# Altium PCB PCB1.PcbDoc
Units mm, origin at the board's own origin, x right, y up, seen from the top; angles counter-clockwise.
Board outline 180 x 120 mm, 4 copper layers (Top Layer, Internal Plane 1, Internal Plane 2, Bottom Layer), stack 0.462 mm thick; 68 components, 59 nets, 300 pads, 20 vias.
Unrouted connection lines stored in the file: 1.
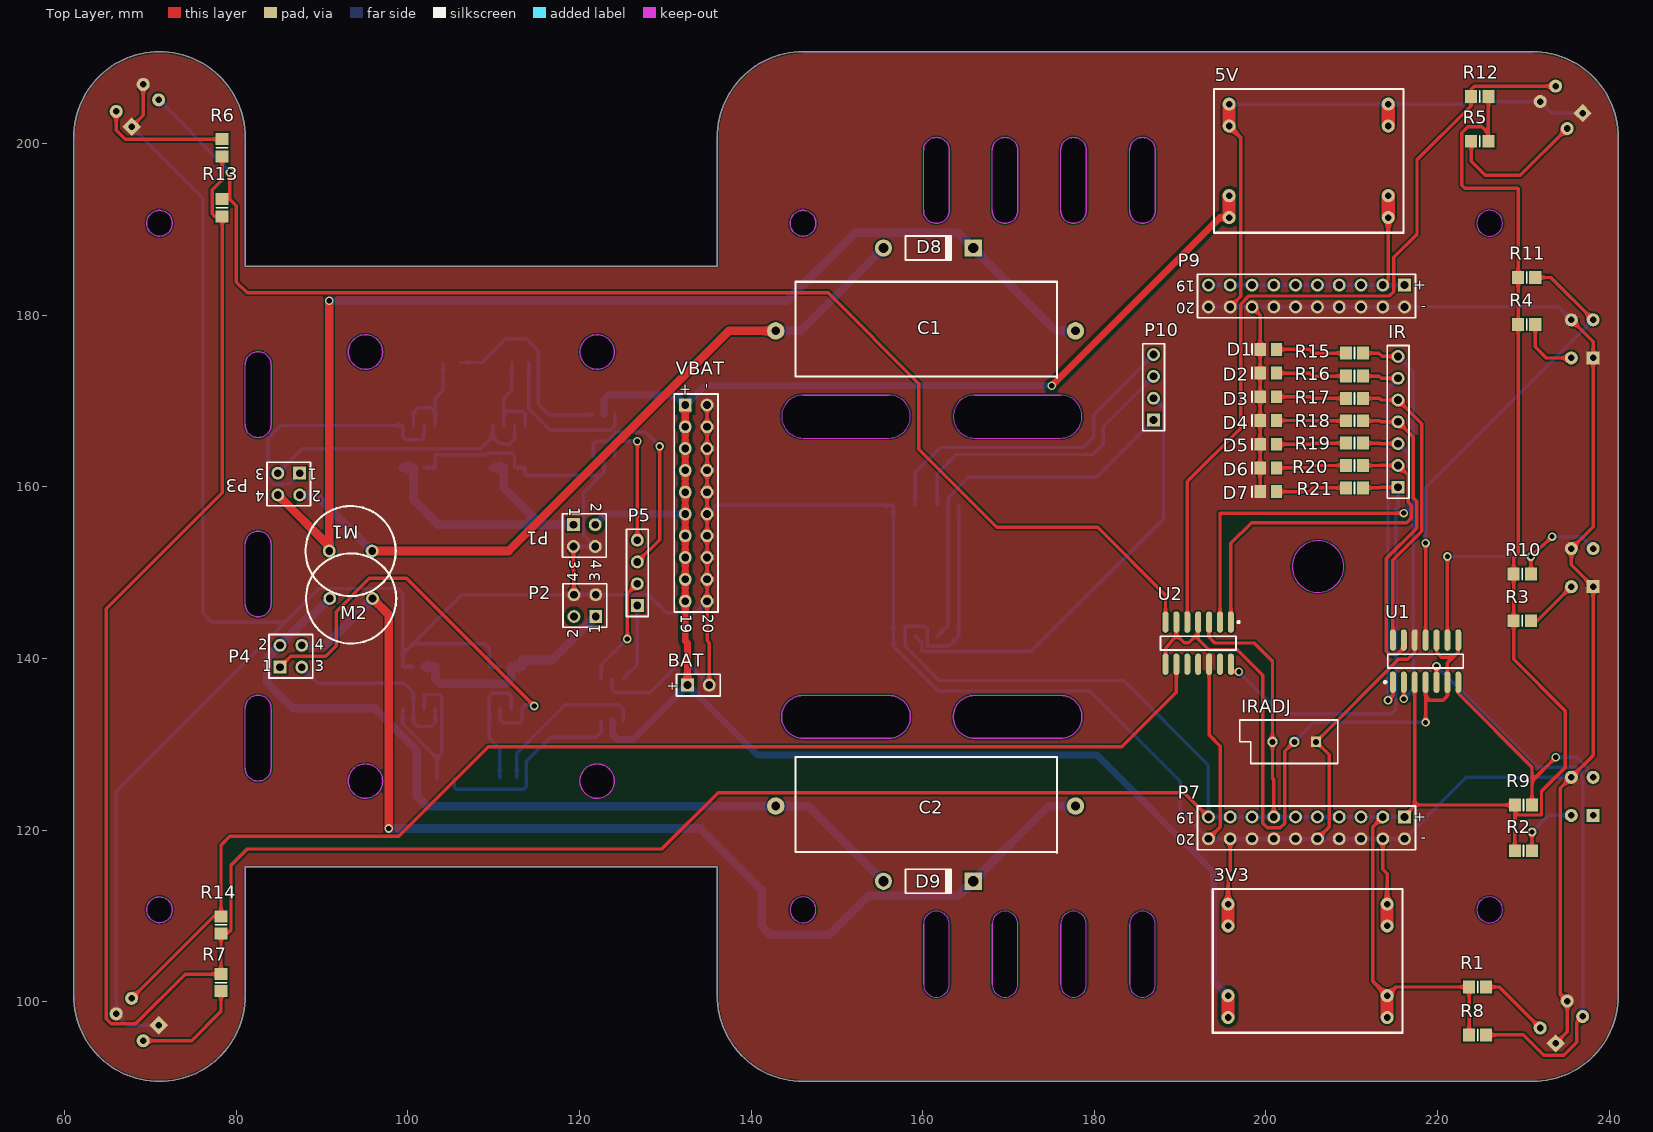
[diagram p0: Top Layer view]
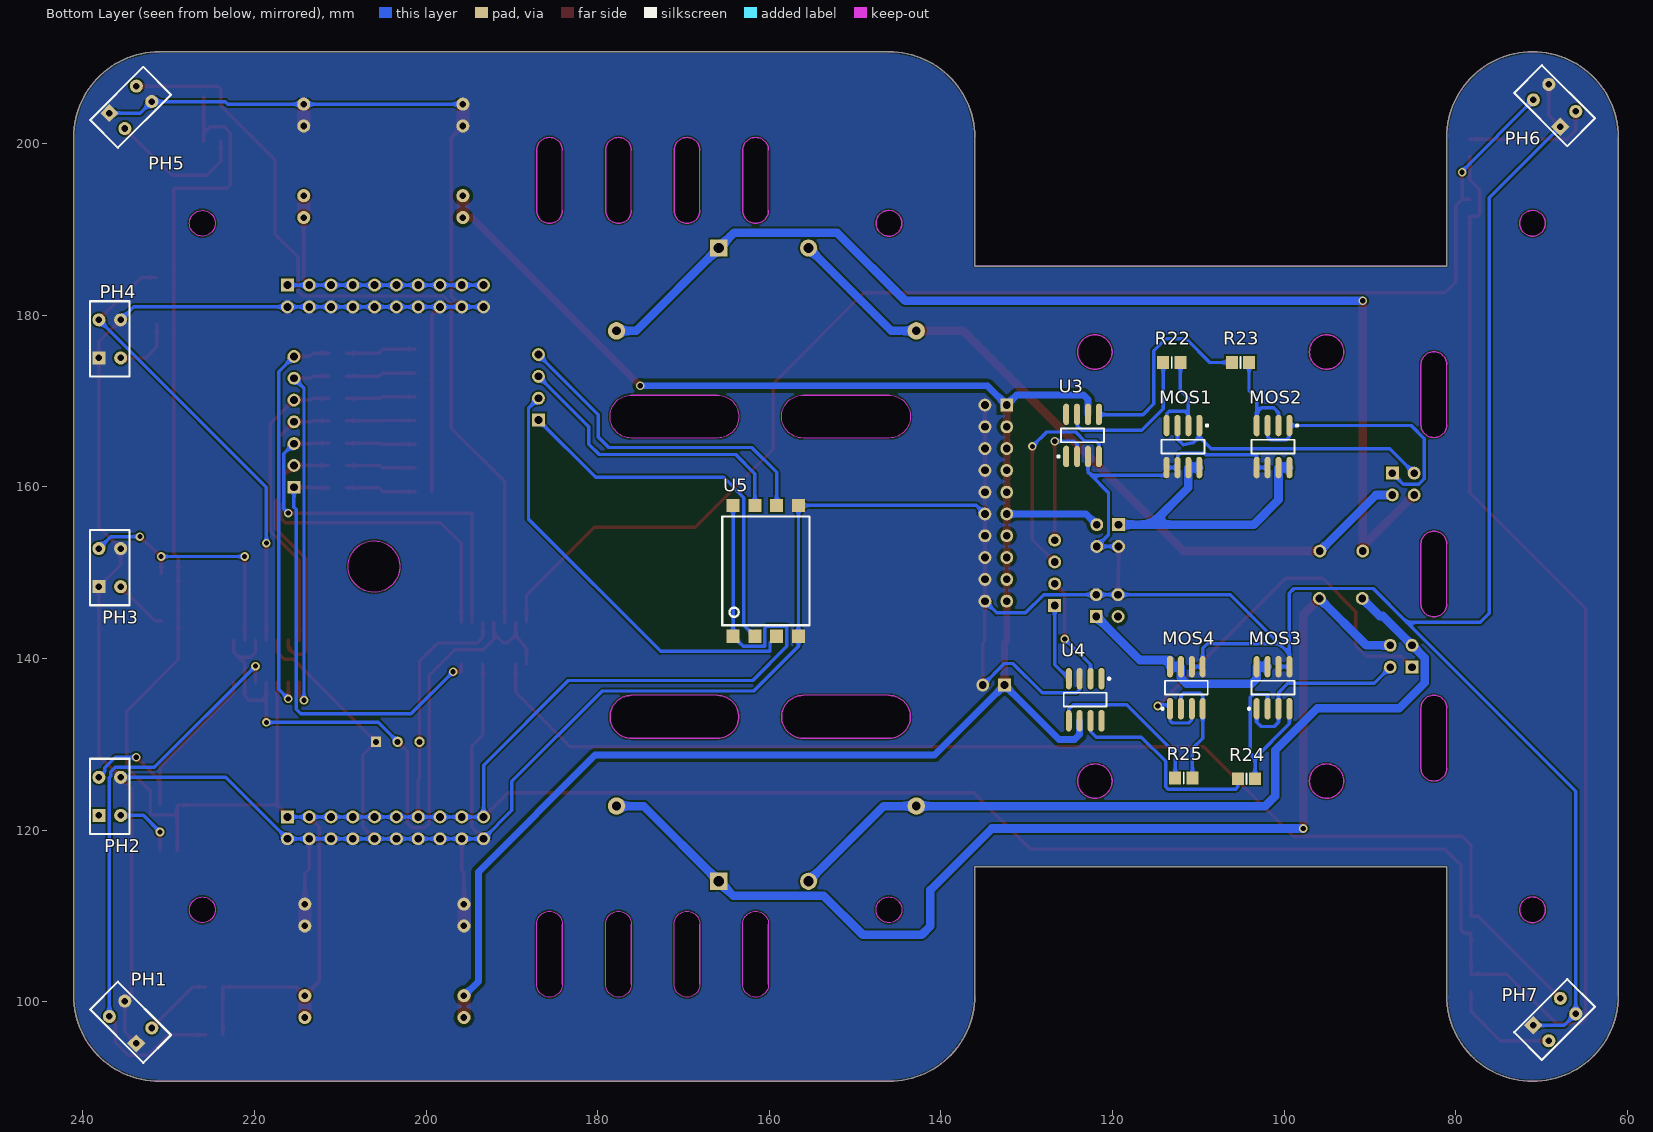
[diagram p1: Bottom Layer view, seen from below]
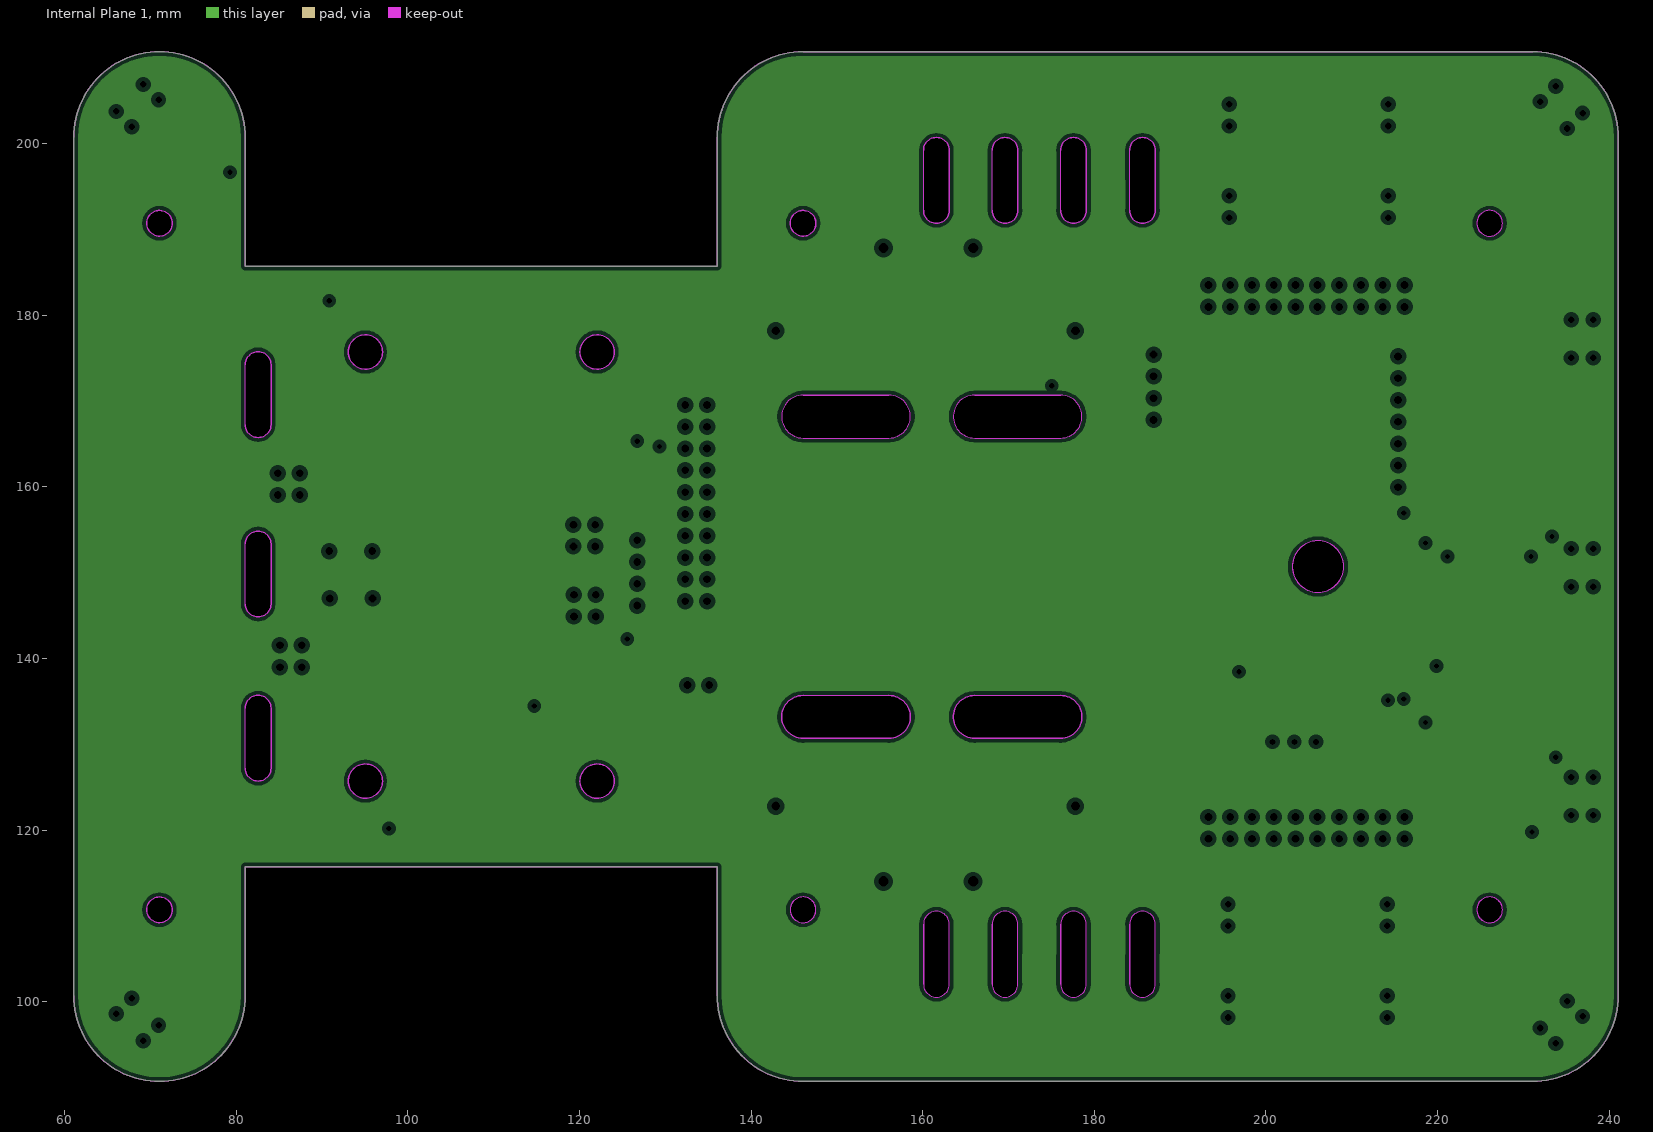
[diagram p2: Internal Plane 1, clearances drawn from the general rule]
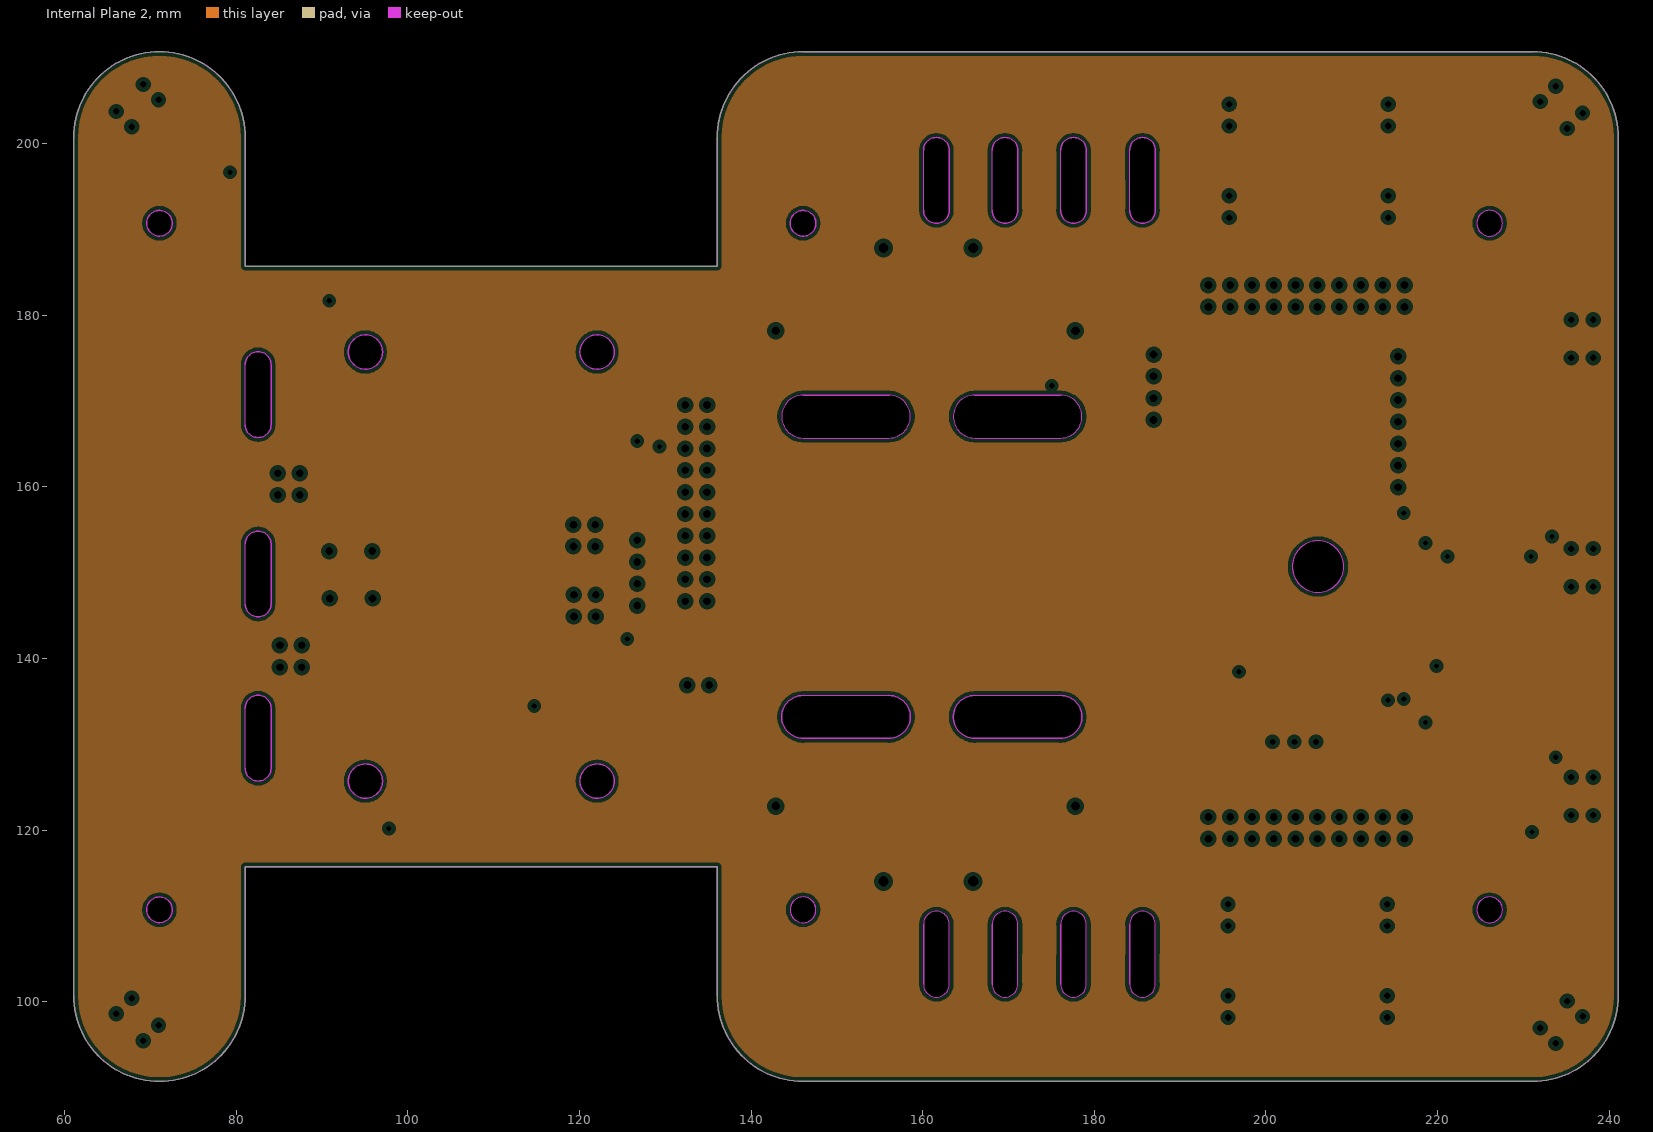
[diagram p3: Internal Plane 2, clearances drawn from the general rule]

## Layer stack, top to bottom
Top Solder: solder mask 0.0102, Solder Resist, Dk 3.5
Top Layer: signal copper 0.0356
Internal Plane 1: plane copper 0.0356
Internal Plane 2: plane copper 0.0356
Dielectric 1: dielectric 0.32, FR-4, Dk 4.8
Bottom Layer: signal copper 0.0356
Bottom Solder: solder mask 0.0102, Solder Resist, Dk 3.5

## Board outline
71.063,90.72 cw(c71.063,100.72) 61.063,100.72 61.063,200.72 cw(c71.063,200.72) 71.063,210.72 cw(c71.063,200.72) 81.063,200.72 81.063,185.72 136.063,185.72 136.063,200.72 cw(c146.063,200.72) 146.063,210.72 231.063,210.72 cw(c231.063,200.72) 241.063,200.72 241.063,100.72 cw(c231.063,100.72) 231.063,90.72 146.063,90.72 cw(c146.063,100.72) 136.063,100.72 136.063,115.72 81.063,115.72 81.063,100.72 cw(c71.063,100.72)
cut-out: 184.114,102.047 ccw(c185.614,102.047) 185.614,100.547 ccw(c185.614,102.047) 187.114,102.047 187.114,109.047 ccw(c185.614,109.047) 185.614,110.547 ccw(c185.614,109.047) 184.114,109.047
cut-out: 176.076,102.047 ccw(c177.576,102.047) 177.576,100.547 ccw(c177.576,102.047) 179.076,102.047 179.076,109.047 ccw(c177.576,109.047) 177.576,110.547 ccw(c177.576,109.047) 176.076,109.047
cut-out: 122.063,173.72 cw(c122.063,175.72) 120.063,175.72 cw(c122.063,175.72) 122.063,177.72 cw(c122.063,175.72) 124.063,175.72 cw(c122.063,175.72)
cut-out: 95.063,173.72 cw(c95.063,175.72) 93.063,175.72 cw(c95.063,175.72) 95.063,177.72 cw(c95.063,175.72) 97.063,175.72 cw(c95.063,175.72)
cut-out: 71.063,189.22 cw(c71.063,190.72) 69.563,190.72 cw(c71.063,190.72) 71.063,192.22 cw(c71.063,190.72) 72.563,190.72 cw(c71.063,190.72)
cut-out: 82.563,165.752 cw(c82.563,167.252) 81.063,167.252 81.063,174.252 cw(c82.563,174.252) 82.563,175.752 cw(c82.563,174.252) 84.063,174.252 84.063,167.252 cw(c82.563,167.252)
cut-out: 82.563,144.853 cw(c82.563,146.353) 81.063,146.353 81.063,153.353 cw(c82.563,153.353) 82.563,154.853 cw(c82.563,153.353) 84.063,153.353 84.063,146.353 cw(c82.563,146.353)
cut-out: 82.563,125.72 cw(c82.563,127.22) 81.063,127.22 81.063,134.22 cw(c82.563,134.22) 82.563,135.72 cw(c82.563,134.22) 84.063,134.22 84.063,127.22 cw(c82.563,127.22)
cut-out: 71.063,109.22 cw(c71.063,110.72) 69.563,110.72 cw(c71.063,110.72) 71.063,112.22 cw(c71.063,110.72) 72.563,110.72 cw(c71.063,110.72)
cut-out: 95.063,123.72 cw(c95.063,125.72) 93.063,125.72 cw(c95.063,125.72) 95.063,127.72 cw(c95.063,125.72) 97.063,125.72 cw(c95.063,125.72)
cut-out: 122.063,123.72 cw(c122.063,125.72) 120.063,125.72 cw(c122.063,125.72) 122.063,127.72 cw(c122.063,125.72) 124.063,125.72 cw(c122.063,125.72)
cut-out: 144.563,110.72 ccw(c146.063,110.72) 146.063,109.22 ccw(c146.063,110.72) 147.563,110.72 ccw(c146.063,110.72) 146.063,112.22 ccw(c146.063,110.72)
cut-out: 160.096,102.047 ccw(c161.596,102.047) 161.596,100.547 ccw(c161.596,102.047) 163.096,102.047 163.096,109.047 ccw(c161.596,109.047) 161.596,110.547 ccw(c161.596,109.047) 160.096,109.047
cut-out: 168.086,102.047 ccw(c169.586,102.047) 169.586,100.547 ccw(c169.586,102.047) 171.086,102.047 171.086,109.047 ccw(c169.586,109.047) 169.586,110.547 ccw(c169.586,109.047) 168.086,109.047
cut-out: 166.063,130.698 cw(c166.063,133.198) 166.063,135.698 176.063,135.698 cw(c176.063,133.198) 176.063,130.698
cut-out: 146.063,130.698 cw(c146.063,133.198) 146.063,135.698 156.063,135.698 cw(c156.063,133.198) 156.063,130.698
cut-out: 203.063,150.72 ccw(c206.063,150.72) 206.063,147.72 ccw(c206.063,150.72) 209.063,150.72 ccw(c206.063,150.72) 206.063,153.72 ccw(c206.063,150.72)
cut-out: 224.563,110.72 ccw(c226.063,110.72) 226.063,109.22 ccw(c226.063,110.72) 227.563,110.72 ccw(c226.063,110.72) 226.063,112.22 ccw(c226.063,110.72)
cut-out: 224.563,190.72 ccw(c226.063,190.72) 226.063,189.22 ccw(c226.063,190.72) 227.563,190.72 ccw(c226.063,190.72) 226.063,192.22 ccw(c226.063,190.72)
cut-out: 161.596,190.72 cw(c161.596,192.22) 160.096,192.22 160.096,199.22 cw(c161.596,199.22) 161.596,200.72 cw(c161.596,199.22) 163.096,199.22 163.096,192.22 cw(c161.596,192.22)
cut-out: 169.586,190.72 cw(c169.586,192.22) 168.086,192.22 168.086,199.22 cw(c169.586,199.22) 169.586,200.72 cw(c169.586,199.22) 171.086,199.22 171.086,192.22 cw(c169.586,192.22)
cut-out: 177.576,190.72 cw(c177.576,192.22) 176.076,192.22 176.076,199.22 cw(c177.576,199.22) 177.576,200.72 cw(c177.576,199.22) 179.076,199.22 179.076,192.22 cw(c177.576,192.22)
cut-out: 185.614,190.72 cw(c185.614,192.22) 184.114,192.22 184.114,199.22 cw(c185.614,199.22) 185.614,200.72 cw(c185.614,199.22) 187.114,199.22 187.114,192.22 cw(c185.614,192.22)
cut-out: 146.063,189.22 cw(c146.063,190.72) 144.563,190.72 cw(c146.063,190.72) 146.063,192.22 cw(c146.063,190.72) 147.563,190.72 cw(c146.063,190.72)
cut-out: 146.063,165.698 156.063,165.698 ccw(c156.063,168.198) 156.063,170.698 146.063,170.698 ccw(c146.063,168.198)
cut-out: 166.063,165.698 176.063,165.698 ccw(c176.063,168.198) 176.063,170.698 166.063,170.698 ccw(c166.063,168.198)

## Design rules (kind name [scope] priority, off if disabled: settings)
Clearance Clearance_1 [InNet('VBAT')] p1: gap=0.4
Clearance [All] p2: gap=0.2
PlaneClearance [All] p1: clearance=0.508
PlaneConnect [All] p1: planeconnectstyle=Relief reliefexpansion=0.508 reliefentries=4 reliefconductorwidth=0.254 reliefairgap=0.254
PolygonConnect [All] p1: connectstyle=Direct reliefconductorwidth=0.254 reliefentries=4 polygonreliefangle="90 Angle" airgapwidth=0.254
RoomDefinition Sheet2 [InComponentClass('Sheet2')] p1: confinementstyle=ConfineIn formatcopy=TRUE lockcomponents=FALSE outline 242.189,142.113 419.862,142.113 419.862,190.246 242.189,190.246
RoomDefinition Sheet1 [InComponentClass('Sheet1')] p2: confinementstyle=ConfineIn formatcopy=TRUE lockcomponents=FALSE outline 242.189,125.857 455.549,125.857 455.549,190.246 242.189,190.246
RoomDefinition POWER [InComponentClass('POWER')] p3: confinementstyle=ConfineIn formatcopy=TRUE lockcomponents=FALSE outline 242.189,92.329 278.511,92.329 278.511,124.714 242.189,124.714
RoutingVias [All] p1: holewidth=0.6 width=1 viastyle="Through Hole" minholewidth=0.711 minwidth=1.27 maxholewidth=0.711 maxwidth=1.27
SolderMaskExpansion [All] p1: expansion=0.102
UnpouredPolygon [All] p1: allowunpoured=FALSE
Width Width_7 [InNet('NetC2_2')] p1: maxlimit=2 minlimit=0.5 preferedwidth=1
Width Width_6 [InNet('NetC2_1')] p2: maxlimit=2 minlimit=0.5 preferedwidth=1
Width Width_5 [InNet('NetC1_2')] p3: maxlimit=2 minlimit=0.5 preferedwidth=1
Width Width_4 [InNet('NetC1_1')] p4: maxlimit=2 minlimit=0.5 preferedwidth=1
Width Width_3 [InNet('VBAT')] p5: maxlimit=2 minlimit=0.5 preferedwidth=0.8
Width Width_2 [InNet('VADJ1')] p6: maxlimit=2 minlimit=0.5 preferedwidth=1
Width Width_1 [InNet('VADJ2')] p7: maxlimit=2 minlimit=0.5 preferedwidth=1
Width [All] p8: maxlimit=2 minlimit=0.254 preferedwidth=0.4
27 further rules are at their usual default settings.

## Classes and differential pairs
component class Sheet2: C1 C2 D8 D9 M1 M2 MOS1 MOS2 MOS3 MOS4 P1 P2 P3 P4 P5 R22 R23 R24 R25 U3 U4
component class Sheet1: D1 D2 D3 D4 D5 D6 D7 IR IRADJ PH1 PH2 PH3 PH4 PH5 PH6 PH7 R1 R2 R3 R4 R5 R6 R7 R8 R9 R10 R11 R12 R13 R14 R15 R16 R17 R18 R19 R20 R21 U1 U2
component class POWER: 3V3 5V BAT P7 P9 P10 U5 VBAT

## Components (designator, comment, footprint, x,y, rotation, side; value= is the part's Value field where it differs from the comment)
3V3 "MP1584EN" PCBComponent_1#1 193.802,96.393 r0 top (schematic designator MO1)
5V "MP1584EN" PCBComponent_1#1 193.929,189.611 r0 top (schematic designator MO2)
BAT "Battery" BAT-2 133.858,136.906 r0 top (schematic designator BT?)
C1 "Cap" PCBComponent_1#2 160.02,178.054 r0 top
C2 "Cap" PCBComponent_1#2 160.02,122.682 r0 top
D1 "LED2" LED_0805 200.279,176.032 r180 top
D2 "LED2" LED_0805 200.279,173.268 r180 top
D3 "LED2" LED_0805 200.279,170.503 r180 top
D4 "LED2" LED_0805 200.279,167.738 r180 top
D5 "LED2" LED_0805 200.279,164.974 r180 top
D6 "LED2" LED_0805 200.279,162.209 r180 top
D7 "LED2" LED_0805 200.279,159.445 r180 top
D8 "tvs-do15" DO-204AL 160.655,187.833 r0 top
D9 "tvs-do15" DO-204AL 160.655,114.046 r0 top
IR "Header 7" HDR1X7 215.392,159.963 r90 top (schematic designator P6)
IRADJ "RPot" VR5 203.3,130.3 r180 top (schematic designator RP1)
M1 "Motor" RB5-10.5 93.345,152.527 r180 top
M2 "Motor" RB5-10.5 93.4,147 r0 top
MOS1 "ao4606" SOIC8_M 111.8,164.7 r270 bottom
MOS2 "ao4606" SOIC8_M 101.3,164.7 r270 bottom
MOS3 "ao4606" SOIC8_M 101.3,136.6 r90 bottom
MOS4 "ao4606" SOIC8_M 111.4,136.6 r90 bottom
P1 "Header 2X2" HDR2X2 119.3,155.6 r270 top
P2 "Header 2X2" HDR2X2 121.9,144.9 r90 top
P3 "Header 2X2" HDR2X2 87.4,161.6 r180 top
P4 "Header 2X2" HDR2X2 85.1,139 r0 top
P5 "Header 4" HDR1X4 126.746,146.177 r90 top
P7 "Header 10X2" HDR2X10 216.154,121.539 r180 top (schematic designator VBAT)
P9 "Header 10X2" HDR2X10 216.154,183.515 r180 top
P10 "Header 4" HDR1X4 186.9,167.8 r90 top
PH1 "封装有误！" RPR359F 229.712,96.139 r45 bottom
PH2 "Optoisolator1" RPR359F 234.569,119.559 r90 bottom
PH3 "Optoisolator1" RPR359F 234.569,146.212 r90 bottom
PH4 "Optoisolator1" RPR359F 234.569,172.864 r90 bottom
PH5 "Optoisolator1" RPR359F 235.908,199.517 r135 bottom
PH6 "Optoisolator1" RPR359F 63.781,202.946 r45 bottom
PH7 "Optoisolator1" RPR359F 69.977,93.218 r135 bottom
R1 "Res3" 6-0805_M 224.663,101.727 r0 top
R2 "Res3" 6-0805_M 229.997,117.602 r0 top
R3 "Res3" 6-0805_M 229.87,144.399 r0 top
R4 "Res3" 6-0805_M 230.378,178.943 r0 top
R5 "Res3" 6-0805_M 224.917,200.279 r180 top
R6 "Res3" 6-0805_M 78.359,199.517 r90 top
R7 "Res3" 6-0805_M 78.232,102.235 r270 top
R8 "Res3" 6-0805_M 224.663,96.139 r180 top
R9 "Res3" 6-0805_M 229.997,122.936 r180 top
R10 "Res3" 6-0805_M 229.87,149.86 r180 top
R11 "Res3" 6-0805_M 230.378,184.404 r180 top
R12 "Res3" 6-0805_M 224.917,205.486 r0 top
R13 "Res3" 6-0805_M 78.359,192.532 r270 top
R14 "Res3" 6-0805_M 78.232,108.966 r270 top
R15 "Res3" 6-0805_M 210.312,175.584 r180 top
R16 "Res3" 6-0805_M 210.312,172.91 r180 top
R17 "Res3" 6-0805_M 210.312,170.307 r180 top
R18 "Res3" 6-0805_M 210.312,167.703 r180 top
R19 "Res3" 6-0805_M 210.312,165.1 r180 top
R20 "Res3" 6-0805_M 210.312,162.496 r180 top
R21 "Res3" 6-0805_M 210.312,159.893 r180 top
R22 "Res3" 6-0805_M 113.1,174.5 r0 bottom
R23 "Res3" 6-0805_M 105.1,174.5 r0 bottom
R24 "Res3" 6-0805_M 104.4,126 r0 bottom
R25 "Res3" 6-0805_M 111.7,126.1 r0 bottom
U1 "LM339AD" SO14_M 218.6,139.7 r90 top
U2 "LM339AD" SO14_M 192.1,141.8 r270 top
U3 "TC4427AEOA" SOIC8_M 123.5,166 r90 bottom
U4 "TC4427AEOA" SOIC8_M 123.2,135.2 r270 bottom
U5 "MPU6050" MPU6050 164.22,142.6 r90 bottom
VBAT "Header 10X2" HDR2X10 132.334,169.545 r270 top (schematic designator P7)

## Footprints (in the part's own frame and the unit in brackets; to place one, negate y for a bottom-side part, rotate by r counter-clockwise, add the part's x,y. Pads: shape width x height; smd on the part's side, far side on the other; paste and mask are expansions set on the pad)
6-0805_M [mm] "Chip Resistor, Body 2.0x1.2mm, IPC Low Density"
  rect 1.4x1.5 smd: 1(-1,0) 2(1,0)
  silkscreen extent 0,-0.65 0,0.65, body extent -1.07,-0.7 1.07,0.7, height 0.7
BAT-2 [mm] "Battery; 2 Leads"
  rect 1.5x1.5 hole 0.9: 1(-1.27,0)
  round 1.5 hole 0.9: 2(1.27,0)
  silkscreen extent -2.54,-1.27 2.54,1.27
DO-204AL [mm] "Diode, Axial; Body 5.2 x 2.7 mm (LxDia. max), Lead Dia. 0.86 mm (max)"
  round 2 hole 1.2: 1(-5.23,0)
  rect 2x2 hole 1.2: 2(5.23,0)
  silkscreen extent -2.65,-1.4 2.75,1.4
HDR1X4 [mm] "Connector; Header; 4 Position"
  rect 1.5x1.5 hole 0.9: 1(0,0)
  round 1.5 hole 0.9: 2(2.54,0) 3(5.08,0) 4(7.62,0)
  silkscreen extent -1.27,-1.27 8.89,1.27
HDR1X7 [mm] "Connector; Header; 7 Position"
  rect 1.5x1.5 hole 0.9: 1(0,0)
  round 1.5 hole 0.9: 2(2.54,0) 3(5.08,0) 4(7.62,0) 5(10.16,0) 6(12.7,0) 7(15.24,0)
  silkscreen extent -1.27,-1.27 16.51,1.27
HDR2X2 [mm] "Connector; Header; 2x2 Position"
  rect 1.5x1.5 hole 0.9: 1(0,0)
  round 1.5 hole 0.9: 2(0,2.54) 3(2.54,0) 4(2.54,2.54)
  silkscreen extent -1.27,-1.27 3.81,3.81
HDR2X10 [mm] "Connector; Header; 10x2 Position"
  rect 1.5x1.5 hole 0.9: 1(0,0)
  round 1.5 hole 0.9: 2(0,2.54) 3(2.54,0) 4(2.54,2.54) 5(5.08,0) 6(5.08,2.54) 7(7.62,0) 8(7.62,2.54) 9(10.16,0) 10(10.16,2.54) 11(12.7,0) 12(12.7,2.54) 13(15.24,0) 14(15.24,2.54) 15(17.78,0) 16(17.78,2.54) 17(20.32,0) 18(20.32,2.54) 19(22.86,0) 20(22.86,2.54)
  silkscreen extent -1.27,-1.27 24.13,3.81
LED_0805 [mm] "贴片二极管"
  rect 1.3x1.5 smd: 1(-0.95,0) 2(0.95,0)
  silkscreen extent 1.91,-0.64 1.91,0.63
MPU6050 [mil]
  rect 60x60 smd: 1(0,0) 2(0,-100) 3(0,-200) 4(0,-300) 5(600,-300) 6(600,-200) 7(600,-100) 8(600,0)
  silkscreen extent 50,-350 550,50
PCBComponent_1#1 [mil]
  round 60 hole 30: 1(70,590) 2(70,490) 3(70,170) 4(70,70) 5(800,70) 6(800,170) 7(800,490) 8(800,590)
  Top Layer lines w60: 70,70 70,170 ; 70,490 70,590 ; 800,70 800,170 ; 800,490 800,590
  silkscreen extent 0,0 870,660
PCBComponent_1#2 [mil]
  round 80 hole 40: 1(-675,5) 2(700,5)
  silkscreen extent -585,-210 615,230
RB5-10.5 [mm] "Capacitor (Radial); 2 Leads"
  round 1.5 hole 0.9: 1(-2.5,0) 2(2.5,0)
  silkscreen extent -5.25,-5.25 5.25,5.25
RPR359F [mil]
  rect 60x60 hole 30: 1(85,140)
  round 60 hole 30: 2(85,40) 3(260,140) 4(260,40)
  silkscreen extent 0,0 345,180
SO14_M [mm] "SOIC, 14-Leads, Body 8.7x3.9mm, Pitch 1.27mm, IPC Low Density"
  oval 2.5x0.7 smd: 1(-2.45,3.81) 2(-2.45,2.54) 3(-2.45,1.27) 4(-2.45,0) 5(-2.45,-1.27) 6(-2.45,-2.54) 7(-2.45,-3.81) 8(2.45,-3.81) 9(2.45,-2.54) 10(2.45,-1.27) 11(2.45,0) 12(2.45,1.27) 13(2.45,2.54) 14(2.45,3.81)
  silkscreen extent -2.57,-4.4 0.8,4.83, body extent -2,-4.38 2,4.38, height 1.75
SOIC8_M [mm] "SOIC, 8-Leads, Body 4.9x3.9mm, Pitch 1.27mm, IPC Low Density"
  oval 2.5x0.7 smd: 1(-2.45,1.905) 2(-2.45,0.635) 3(-2.45,-0.635) 4(-2.45,-1.905) 5(2.45,-1.905) 6(2.45,-0.635) 7(2.45,0.635) 8(2.45,1.905)
  silkscreen extent -2.57,-2.5 0.8,2.93, body extent -2,-2.5 2,2.5, height 1.75
VR5 [mm] "Thru-Hole; 3 Leads"
  rect 1.2x1.2 hole 0.7: 1(-2.54,0)
  round 1.2 hole 0.7: 2(0,0) 3(2.54,0)
  silkscreen extent -5.08,-2.54 6.35,2.54

## Part data
BAT: "Multicell Battery"
C1 C2: "Capacitor"
D1 D2 D3 D4 D5 D6 D7: "Typical RED, GREEN, YELLOW, AMBER GaAs LED"
IR: "Header, 7-Pin"
IRADJ: "Potentiometer"
M1 M2: "Motor, General Kind"
P1 P2 P3 P4: "Header, 2-Pin, Dual row"
P5 P10: "Header, 4-Pin"
P7 P9 VBAT: "Header, 10-Pin, Dual row"
PH1: library part Optoisolator1, "4-Pin Phototransistor Optocoupler"
PH2 PH3 PH4 PH5 PH6 PH7: "4-Pin Phototransistor Optocoupler"
R1 R2 R3 R4 R5 R6 R7 R8 R9 R10 R11 R12 R13 R14 R15 R16 R17 R18 R19 R20 R21 R22 R23 R24 R25: "Resistor"
U1 U2: "Low-Power Quad Voltage Comparator"
U3 U4: "1.5A Dual High-Speed Power MOSFET Driver, Non-Inverting, Industrial Temperature"

## Via types
v1: diameter 1, hole 0.6, Top Layer to Bottom Layer, 20 vias

## Nets (pads, with @x,y where several pads share a name; then routed paths per layer and width w, separated by ;. In a path a pad name is that pad's centre, name@x,y a point inside that pad or via, vN(x,y) a via of type N, cw(c..) or ccw(c..) an arc to the next point about the centre after c; other vN are vias at no path point)
3V3: 3V3.5 3V3.6 IRADJ.3 P7.1 P7.3 P7.5 P7.7 P7.9 P7.11 P7.13 P7.15 P7.17 P7.19 R1.1 R2.1 R3.1 R4.1 R5.1 R6.1 R7.1 R8.2 R9.2 R10.2 R11.2 R12.2 R13.2 R14.2 U1.3 U2.3 U5.1 U5.8 | length 553.4
  Top Layer w0.4: R6.1 78.359,195.809 77.191,194.64 77.191,191.811 77.47,191.532 R13.2 78.359,159.309 64.846,145.796 64.846,98.044 65.456,97.434 68.275,97.434 74.076,103.235 R7.1 R14.2 78.994,107.966 79.4,108.372 79.4,115.926 81.28,117.805 129.591,117.805 136.169,124.384 190.449,124.384 P7.19 ; U2.3 193.37,142.494 194.056,141.808 198.652,141.808 200.76,139.7 IRADJ.3 200.76,126.062 200.914,125.908 P7.13 ; P7.3 212.446,120.371 212.446,102.387 3V3.6 215.138,101.727 R1.1 R8.2 ; P7.1 217.33,122.936 ; U1.3 217.33,122.936 ; R5.1 225.917,201.168 ; R12.2 225.917,201.168 ; R2.1 228.997,122.133 ; 217.33,122.936 R9.2 228.997,122.133 ; 225.917,201.168 225.13,201.955 223.52,201.955 222.809,201.244 222.809,195.148 223.139,194.818 229.311,194.818 229.378,194.751 R11.2 R4.1 229.378,152.264 228.87,151.756 R10.2 R3.1 228.87,139.903 234.899,133.874 234.899,127.33 232.105,124.536 232.105,121.768 229.362,121.768 228.997,122.133
  Bottom Layer w0.4: U5.8 U5.1 163.058,141.438 160.518,141.438 160.518,143.51 160.264,143.764 157.963,143.764 157.963,141.427 161.95,137.439 183.439,137.439 193.294,127.584 P7.19 P7.17 P7.15 P7.13 P7.11 P7.9 P7.7 P7.5 P7.3 P7.1
5V: 5V.5 5V.6 P9.1 P9.3 P9.5 P9.7 P9.9 P9.11 P9.13 P9.15 P9.17 P9.19 | length 31
  Top Layer w0.4: P9.3 214.249,184.15 5V.5
  Bottom Layer w0.4: P9.19 P9.17 P9.15 P9.13 P9.11 P9.9 P9.7 P9.5 P9.3 P9.1
GND: 3V3.1 3V3.2 3V3.7 3V3.8 5V.1 5V.2 5V.7 5V.8 BAT.2 D1.2 D2.2 D3.2 D4.2 D5.2 D6.2 D7.2 IRADJ.1 MOS1.5 MOS1.6 MOS2.5 MOS2.6 MOS3.5 MOS3.6 MOS4.5 MOS4.6 P1.3 P1.4 P2.3 P2.4 P7.2 P7.4 P7.6 P7.8 P7.10 P7.12 P7.14 P7.16 P7.18 P7.20 P9.2 P9.4 P9.6 P9.8 P9.10 P9.12 P9.14 P9.16 P9.18 P9.20 PH1.1 PH1.4 PH2.4 PH3.1 PH3.4 PH4.1 PH4.4 PH5.1 PH5.4 PH6.1 PH6.4 PH7.1 PH7.4 U1.12 U2.12 U3.3 U4.3 U5.4 U5.5 VBAT.2 VBAT.4 VBAT.6 VBAT.8 VBAT.10 VBAT.12 VBAT.14 VBAT.16 VBAT.18 VBAT.20 | length 724.3
  Top Layer w0.4: PH6.1 69.169,203.305 PH6.4 ; P1.3 119.3,150.276 119.36,150.216 P2.4 ; VBAT.2 VBAT.4 VBAT.6 VBAT.8 VBAT.10 VBAT.12 VBAT.14 VBAT.16 VBAT.18 VBAT.20 134.874,142.062 135.128,141.808 BAT.2 ; P7.20 194.666,120.371 194.666,129.794 193.37,131.09 U2.12 ; 3V3.1 195.58,115.062 195.834,115.316 P7.18 ; 5V.2 197.079,200.685 197.079,182.22 P9.18 ; P9.16 199.329,180.02 D1.2 D2.2 D3.2 D4.2 D5.2 D6.2 D7.2 ; P7.10 207.366,120.371 207.366,128.774 IRADJ.1 215.44,139.9 216.514,139.9 217.33,140.716 U1.12 ; P7.4 213.614,115.443 214.122,114.935 3V3.8 ; PH1.1 235.1,96.498 PH1.4 234.29,100.901 234.29,124.867 PH2.4 238.125,128.703 PH3.1 235.585,150.911 PH3.4 238.125,155.356 PH4.1 238.125,176.928 PH4.4
  Bottom Layer w0.4: PH6.1 76.098,193.682 76.098,145.288 77.165,144.221 85.7,144.221 ; PH7.1 67.373,97.259 PH7.4 66.026,124.547 85.7,144.221 ; MOS3.6 MOS3.5 99.395,140.538 ; MOS2.6 MOS2.5 103.205,163.754 109.144,163.754 109.29,163.9 112.111,163.9 112.435,163.576 MOS1.6 MOS1.5 113.705,161.341 122.479,161.341 ; MOS4.6 MOS4.5 109.495,141.224 108.987,141.732 100.589,141.732 ; P1.3 P1.4 120.472,154.428 120.472,159.334 122.479,161.341 ; U3.3 122.865,161.727 122.479,161.341 ; U4.3 123.835,136.363 124.206,135.992 128.219,135.992 131.648,139.421 132.613,139.421 BAT.2 ; VBAT.20 133.502,145.313 130.15,145.313 128.023,147.44 P2.3 P2.4 106.297,147.44 100.589,141.732 ; VBAT.12 135.869,157.84 U5.5 U5.4 156.6,141.44 161.819,136.22 179.476,136.22 189.992,125.705 189.992,122.301 P7.20 P7.18 P7.16 P7.14 P7.12 P7.10 P7.8 P7.6 P7.4 P7.2 223.318,126.163 PH2.4 ; P9.20 P9.18 P9.16 P9.14 P9.12 P9.10 P9.8 P9.6 P9.4 P9.2 234.078,180.975 PH4.4 ; 5V.1 5V.8 223.088,204.597 223.396,204.905 PH5.4 233.304,203.558 PH5.1 ; 85.7,144.221 89.637,148.158 98.857,148.158 99.395,147.62 99.395,140.543 ; 99.395,140.538 100.589,141.732 ; 99.395,140.538 99.395,140.543 ; 99.395,140.543 100.584,141.732 100.589,141.732
IR1: IR.7 R15.1 U1.2 | length 47.3
  Top Layer w0.4: R15.1 213.157,175.584 213.538,175.203 IR.7 ; v1(216.06,135.306) U1.2
  Bottom Layer w0.4: IR.7 217.17,173.425 217.17,136.416 v1(216.06,135.306)
IR2: IR.6 R16.1 U1.1 | length 44.5
  Top Layer w0.4: R16.1 213.208,172.91 213.455,172.663 IR.6 ; v1(214.224,135.136) 214.79,135.702 U1.1
  Bottom Layer w0.4: v1(214.224,135.136) 214.224,171.495 IR.6
IR3: IR.5 R17.1 U1.14 | length 34.7
  Top Layer w0.4: R17.1 213.258,170.307 213.442,170.123 IR.5 218.153,167.362 218.153,154.841 214.79,151.478 U1.14
IR4: IR.4 R18.1 U1.13 | length 36.6
  Top Layer w0.4: R18.1 213.284,167.703 213.404,167.583 IR.4 217.16,165.815 217.16,158.704 217.553,158.312 217.553,155.188 214.02,151.656 214.02,140.843 214.376,140.487 215.298,140.487 216.06,141.249 U1.13
IR5: IR.3 R19.1 U2.2 | length 47
  Top Layer w0.4: U2.2 194.64,156.946 v1(216.052,156.947) ; R19.1 213.309,165.1 213.366,165.043 IR.3
  Bottom Layer w0.4: IR.3 216.56,163.875 216.56,157.455 v1(216.052,156.947)
IR6: IR.2 R20.1 U2.1 | length 42.3
  Top Layer w0.4: U2.1 195.91,153.416 198.323,155.829 216.408,155.829 216.953,156.374 216.953,157.841 216.56,158.233 216.56,161.335 IR.2 213.341,162.503 213.335,162.496 R20.1
IR7: IR.1 R21.1 U2.14 | length 52.4
  Top Layer w0.4: U2.14 195.91,138.455 v1(196.85,138.455) ; R21.1 213.309,159.893 213.379,159.963 IR.1
  Bottom Layer w0.4: v1(196.85,138.455) 201.752,133.553 214.579,133.553 215.138,134.112 215.138,157.378 215.392,157.632 IR.1
NetC1_1: C1.1 D8.1 M1.1 P3.2 | length 85.4
  Top Layer w1: M1.1 111.735,152.527 137.389,178.181 C1.1
  Bottom Layer w1: P3.2 89.312,159.06 M1.1 ; C1.1 145.773,178.181 D8.1
NetC1_2: C1.2 D8.2 M1.2 P3.4 | length 132.6
  Top Layer w1: P3.4 M1.2@90.845,153.075 ; M1.2 M1.2@90.845,153.075 ; v1(90.845,181.686) M1.2@90.845,153.075
  Bottom Layer w1: v1(90.845,181.686) 144.17,181.686 152.095,189.611 164.107,189.611 D8.2 175.537,178.181 C1.2
NetC2_1: C2.1 D9.1 M2.1 P4.2 | length 97.5
  Bottom Layer w1: M2.1 88.858,144.958 88.518,144.958 P4.2 83.642,140.082 83.642,137.16 86.614,134.188 96.164,134.188 101.067,129.286 101.067,123.952 102.21,122.809 C2.1 146.662,122.809 D9.1
NetC2_2: C2.2 D9.2 M2.2 P4.4 | length 131.9
  Top Layer w1: M2.2 97.79,145.11 v1(97.79,120.193)
  Bottom Layer w1: P4.4 90.44,141.54 M2.2 ; v1(97.79,120.193) 134.061,120.193 141.224,113.03 141.224,108.839 142.24,107.823 149.123,107.823 153.645,112.344 164.183,112.344 D9.2 174.648,122.809 C2.2
NetD1_1: D1.1 R15.2 | length 8.3
  Top Layer w0.4: D1.1 205.029,176.032 205.477,175.584 R15.2
NetD2_1: D2.1 R16.2 | length 8.2
  Top Layer w0.4: D2.1 205.08,173.268 205.437,172.91 R16.2
NetD3_1: D3.1 R17.2 | length 8.2
  Top Layer w0.4: D3.1 205.156,170.503 205.352,170.307 R17.2
NetD4_1: D4.1 R18.2 | length 8.1
  Top Layer w0.4: D4.1 205.232,167.739 205.267,167.703 R18.2
NetD5_1: D5.1 R19.2 | length 8.1
  Top Layer w0.4: D5.1 205.207,164.974 205.333,165.1 R19.2
NetD6_1: D6.1 R20.2 | length 8.2
  Top Layer w0.4: D6.1 205.105,162.209 205.392,162.496 R20.2
NetD7_1: D7.1 R21.2 | length 8.3
  Top Layer w0.4: D7.1 205.029,159.445 205.477,159.893 R21.2
NetIRADJ_3: IRADJ.2 U1.4 U1.6 U1.8 U1.10 U2.4 U2.6 U2.8 | length 84.8
  Top Layer w0.4: U2.8 188.29,141.148 189.56,142.748 ; U2.6 189.56,142.748 ; U2.4 192.1,142.926 ; IRADJ.2 202.184,129.184 202.184,120.777 201.676,120.269 200.152,120.269 199.644,120.777 199.644,138.049 196.672,141.021 193.319,141.021 192.1,142.24 192.1,142.926 ; v1(218.6,132.563) 218.6,135.636 ; U1.4 218.6,135.636 ; U1.10 219.87,140.716 220.429,140.157 221.851,140.157 ; U1.8 222.41,140.716 221.851,140.157 ; 189.56,142.748 190.474,141.834 191.008,141.834 192.1,142.926 ; 218.6,135.636 219.108,135.128 220.632,135.128 221.14,135.636 U1.6 221.14,139.446 221.851,140.157
  Bottom Layer w0.4: IRADJ.2 205.563,132.563 v1(218.6,132.563)
NetMOS1_1: MOS1.1 MOS1.3 P3.3 | length 32.8
  Bottom Layer w0.4: P3.3 87.7,164.44 108.484,164.44 109.895,165.85 ; MOS1.1 109.895,165.85 ; MOS1.3 112.435,165.572 111.76,164.897 110.606,165.139 109.895,165.85
NetMOS1_2: MOS1.2 MOS1.4 R22.1 | length 11.9
  Bottom Layer w0.4: MOS1.2 111.165,168.467 ; R22.1 112.1,171.267 111.165,170.332 111.165,168.467 ; MOS1.4 113.705,168.504 113.4,168.808 111.506,168.808 111.165,168.467
NetMOS2_1: MOS2.1 MOS2.3 P3.1 | length 31
  Bottom Layer w0.4: P3.1 86.125,160.325 84.328,160.325 83.693,160.96 83.693,165.633 85.217,167.157 99.395,167.157 MOS2.1 99.395,165.862 99.776,165.481 101.6,165.481 101.935,165.816 MOS2.3
NetMOS2_2: MOS2.2 MOS2.4 R23.1 | length 12.2
  Bottom Layer w0.4: MOS2.2 100.665,168.656 101.224,169.215 102.646,169.215 103.205,168.656 ; MOS2.4 103.205,168.656 ; R23.1 104.1,171.253 103.205,170.358 103.205,168.656
NetMOS3_1: MOS3.1 MOS3.3 P4.3 | length 22.2
  Bottom Layer w0.4: P4.3 89.531,137.109 99.568,137.109 100.665,136.012 MOS3.3 100.665,132.588 101.173,132.08 102.697,132.08 103.205,132.588 MOS3.1
NetMOS3_2: MOS3.2 MOS3.4 R24.1 | length 21
  Bottom Layer w0.4: MOS3.4 99.395,132.38 103.4,128.372 ; MOS3.2 101.935,135.814 103.632,135.814 103.962,135.484 103.962,128.934 103.4,128.372 ; R24.1 103.4,128.372
NetMOS4_1: MOS4.1 MOS4.3 P4.1 | length 49.6
  Top Layer w0.4: P4.1 86.359,140.259 90.424,140.259 91.643,141.478 91.643,145.466 95.529,149.352 99.847,149.352 v1(114.732,134.468)
  Bottom Layer w0.4: MOS4.3 110.765,132.842 111.121,132.486 113.03,132.486 113.305,132.761 MOS4.1 113.775,134.62 114.579,134.62 v1(114.732,134.468)
NetMOS4_2: MOS4.2 MOS4.4 R25.1 | length 14.3
  Bottom Layer w0.4: R25.1 110.7,129.515 109.495,130.72 MOS4.4 109.495,135.636 109.8,135.941 111.76,135.941 112.035,135.666 MOS4.2
NetPH1_1: PH1.2 R1.2 | length 8.3
  Top Layer w0.4: R1.2 227.177,101.727 PH1.2
NetPH1_4: PH1.3 R8.1 U1.5 | length 67.9
  Top Layer w0.4: U1.5 v1(219.87,139.116) ; R8.1 229.995,96.139 232.357,93.777 234.696,93.777 236.22,95.301 236.22,97.618 PH1.3
  Bottom Layer w0.4: v1(219.87,139.116) 231.656,127.33 236.22,127.33 236.753,126.797 236.753,126.263 236.896,126.121 PH1.3
NetPH2_1: PH2.2 R2.2 | length 7.6
  Top Layer w0.4: R2.2 v1(230.997,119.789)
  Bottom Layer w0.4: v1(230.997,119.789) 232.926,121.718 PH2.2
NetPH2_4: PH2.3 R9.1 U1.7 | length 27.4
  Top Layer w0.4: U1.7 222.41,135.941 230.997,127.354 230.997,125.73 ; R9.1 230.997,125.73 ; v1(233.766,128.499) 230.997,125.73
  Bottom Layer w0.4: v1(233.766,128.499) 236.22,128.499 237.435,127.283 237.435,126.853 PH2.3
NetPH3_1: PH3.2 R3.2 | length 6.4
  Top Layer w0.4: R3.2 231.613,144.399 PH3.2
NetPH3_4: PH3.3 R10.1 U1.9 | length 30.2
  Top Layer w0.4: U1.9 v1(221.14,151.892) ; R10.1 v1(230.87,151.892) v1(233.35,154.203)
  Bottom Layer w0.4: v1(221.14,151.892) v1(230.87,151.892) ; v1(233.35,154.203) 236.737,154.203 PH3.3
NetPH4_1: PH4.2 R4.2 | length 7.4
  Top Layer w0.4: R4.2 231.378,176.309 232.664,175.023 PH4.2
NetPH4_4: PH4.3 R11.1 U1.11 | length 54.2
  Top Layer w0.4: U1.11 v1(218.6,153.449) ; R11.1 233.189,184.404 PH4.3
  Bottom Layer w0.4: v1(218.6,153.449) 218.6,159.943 PH4.3
NetPH5_1: PH5.2 R5.2 | length 16.5
  Top Layer w0.4: R5.2 223.917,197.926 225.552,196.291 229.629,196.291 PH5.2
NetPH5_4: PH5.3 R12.1 U2.5 | length 95.4
  Top Layer w0.4: U2.5 190.83,160.629 197.053,166.853 197.053,181.281 198.018,182.245 214.376,182.245 214.884,182.753 214.884,186.741 217.602,189.459 217.602,198.104 223.917,204.419 R12.1 223.917,206.336 224.282,206.701 PH5.3
NetPH6_1: PH6.2 R6.2 | length 15
  Top Layer w0.4: PH6.2 66.026,201.547 67.056,200.517 R6.2
NetPH6_4: PH6.3 R13.1 U2.7 | length 157.8
  Top Layer w0.4: v1(79.273,196.672) 79.273,193.548 R13.1 79.257,193.532 80.01,192.779 80.01,183.871 81.28,182.601 148.996,182.601 159.563,172.034 159.563,164.363 168.631,155.296 180.391,155.296 188.29,147.396 U2.7
  Bottom Layer w0.4: PH6.3 79.273,196.793 v1(79.273,196.672)
NetPH7_1: PH7.2 R7.2 | length 12.8
  Top Layer w0.4: PH7.2 74.813,95.463 78.232,98.882 R7.2
NetPH7_4: PH7.3 R14.1 U2.9 | length 144.6
  Top Layer w0.4: PH7.3 77.386,109.966 R14.1 78.232,118.262 79.248,119.278 98.933,119.278 109.372,129.718 183.185,129.718 189.56,136.093 U2.9
NetR22_2: R22.2 U3.7 | length 18
  Bottom Layer w0.4: R22.2 114.1,169.114 116.616,166.599 123.602,166.599 124.135,167.132 U3.7
NetR23_2: R23.2 U3.5 | length 23.9
  Bottom Layer w0.4: R23.2 108.661,174.5 111.428,177.267 113.792,177.267 115.214,175.844 115.214,169.672 116.459,168.427 121.595,168.427 U3.5
NetR24_2: R24.2 U4.7 | length 24
  Bottom Layer w0.4: R24.2 105.4,125.054 105.664,124.79 113.538,124.79 113.817,125.07 113.817,128.016 116.647,130.845 121.92,130.845 122.565,131.49 U4.7
NetR25_2: R25.2 U4.5 | length 19.2
  Bottom Layer w0.4: R25.2 112.7,128.956 118.364,134.62 124.597,134.62 125.105,134.112 U4.5
PWM1-1: P5.4 U3.2 | length 15.7
  Top Layer w0.4: P5.4 v1(126.746,165.329)
  Bottom Layer w0.4: U3.2 124.135,165.004 124.46,165.329 v1(126.746,165.329)
PWM1-2: P5.3 U3.4 | length 25
  Top Layer w0.4: P5.3 129.337,153.848 v1(129.337,164.719)
  Bottom Layer w0.4: U3.4 121.595,165.004 121.92,165.329 123.241,165.329 124.308,166.395 127.66,166.395 v1(129.337,164.719)
PWM2-1: P5.2 U4.2 | length 12.8
  Top Layer w0.4: v1(125.578,142.281) 125.578,147.549 P5.2
  Bottom Layer w0.4: U4.2 122.565,139.268 v1(125.578,142.281)
PWM2-2: P5.1 U4.4 | length 9.2
  Bottom Layer w0.4: U4.4 126.746,139.291 P5.1
RX: P10.1 U5.2 | length 44.4
  Bottom Layer w0.4: U5.2 162.966,143.886 162.966,158.75 165.329,161.112 180.212,161.112 P10.1
SCL: P10.3 U5.7 | length 34.8
  Bottom Layer w0.4: U5.7 161.68,161.544 163.915,163.779 179.832,163.779 181.026,164.973 181.026,167.006 P10.3
SDA: P10.4 U5.6 | length 38.8
  Bottom Layer w0.4: U5.6 159.14,161.705 162.027,164.592 178.689,164.592 179.908,165.811 179.908,168.428 P10.4
TX: P10.2 U5.3 | length 51.2
  Bottom Layer w0.4: U5.3 159.918,141.822 159.918,140.838 172.664,140.838 188.062,156.235 188.062,169.178 P10.2
VADJ1: MOS1.7 MOS1.8 MOS2.7 MOS2.8 P1.1 | length 34.6
  Bottom Layer w1: MOS2.8 MOS2.7 100.665,158.496 103.561,155.6 115.498,155.6 ; MOS1.8 MOS1.7 111.165,159.933 115.498,155.6 ; P1.1 115.498,155.6
VADJ2: MOS3.7 MOS3.8 MOS4.7 MOS4.8 P2.1 | length 26.1
  Bottom Layer w1: MOS3.7 MOS3.8 103.205,137.668 103.789,137.084 111.404,137.084 112.035,137.714 MOS4.7 MOS4.8 113.305,139.827 116.827,139.827 P2.1
VBAT: 3V3.3 3V3.4 5V.3 5V.4 BAT.1 P1.2 P2.2 U3.6 U4.6 VBAT.1 VBAT.3 VBAT.5 VBAT.7 VBAT.9 VBAT.11 VBAT.13 VBAT.15 VBAT.17 VBAT.19 | length 226.8
  Top Layer w0.8: VBAT.1 VBAT.3 VBAT.5 VBAT.7 VBAT.9 VBAT.11 VBAT.13 VBAT.15 VBAT.17 VBAT.19 132.334,142.062 132.588,141.808 BAT.1 ; v1(175.031,171.78) 194.64,191.389 5V.4
  Bottom Layer w0.8: P1.2 123.085,156.845 VBAT.11 ; U3.6 122.865,170.18 123.378,170.693 131.186,170.693 VBAT.1 134.569,171.78 v1(175.031,171.78) ; U4.6 123.835,131.13 124.409,130.556 126.238,130.556 BAT.1 140.741,128.753 180.289,128.753 193.904,115.138 193.904,102.387 3V3.3
pads on no net: PH2.1 U2.10 U2.11 U2.13 U3.1 U3.8 U4.1 U4.8

## Polygon pours and split planes (outlines as drawn)
GND on Top Layer "Top Layer-No Net" (solid, remove dead copper, pour order 4): 55.8,215.7 56.7,216.6 248,216.6 248,94 246.6,92.6 240.1,86.1 53,86.1
GND on Bottom Layer "Top Layer-No Net" (solid, remove dead copper, pour order 6): 54.7,220.5 248.5,220.5 249.4,219.6 249.1,219.3 249.1,85.8 53.9,85.8 51.6,88.1

## Keep-outs
Keep-Out Layer:
  circle w0.006: c226.063,110.72 r1.5
  circle w0.006: c226.063,190.72 r1.5
  circle w0.006: c146.063,110.72 r1.5
  circle w0.006: c146.063,190.72 r1.5
  circle w0.006: c71.063,110.72 r1.5
  circle w0.006: c71.063,190.72 r1.5
  circle w0.006: c206.063,150.72 r3
  circle w0.006: c122.063,125.72 r2
  circle w0.006: c95.063,125.72 r2
  circle w0.006: c122.063,175.72 r2
  circle w0.006: c95.063,175.72 r2
  lines w0.006: 179.076,192.22 cw(c177.576,192.22) 177.576,190.72 cw(c177.576,192.22) 176.076,192.22 176.076,199.22 cw(c177.576,199.22) 177.576,200.72 cw(c177.576,199.22) 179.076,199.22 ; 179.076,192.22 179.076,199.22 ; 61.063,100.72 ccw(c71.063,100.72) 71.063,90.72 ccw(c71.063,100.72) 81.063,100.72 81.063,115.72 136.063,115.72 136.063,100.72 ccw(c146.063,100.72) 146.063,90.72 231.063,90.72 ccw(c231.063,100.72) 241.063,100.72 241.063,200.72 ccw(c231.063,200.72) 231.063,210.72 146.063,210.72 ccw(c146.063,200.72) 136.063,200.72 136.063,185.72 81.063,185.72 81.063,200.72 ccw(c71.063,200.72) 71.063,210.72 ccw(c71.063,200.72) 61.063,200.72 61.063,100.72 ; 81.063,127.22 ccw(c82.563,127.22) 82.563,125.72 ccw(c82.563,127.22) 84.063,127.22 84.063,134.22 ccw(c82.563,134.22) 82.563,135.72 ccw(c82.563,134.22) 81.063,134.22 81.063,127.22 ; 81.063,146.353 ccw(c82.563,146.353) 82.563,144.853 ccw(c82.563,146.353) 84.063,146.353 84.063,153.353 ccw(c82.563,153.353) 82.563,154.853 ccw(c82.563,153.353) 81.063,153.353 81.063,146.353 ; 81.063,167.252 ccw(c82.563,167.252) 82.563,165.752 ccw(c82.563,167.252) 84.063,167.252 84.063,174.252 ccw(c82.563,174.252) 82.563,175.752 ccw(c82.563,174.252) 81.063,174.252 81.063,167.252 ; 146.063,130.698 cw(c146.063,133.198) 146.063,135.698 156.063,135.698 cw(c156.063,133.198) 156.063,130.698 146.063,130.698 ; 146.063,165.698 cw(c146.063,168.198) 146.063,170.698 156.063,170.698 cw(c156.063,168.198) 156.063,165.698 146.063,165.698 ; 160.096,102.047 ccw(c161.596,102.047) 161.596,100.547 ccw(c161.596,102.047) 163.096,102.047 163.096,109.047 ccw(c161.596,109.047) 161.596,110.547 ccw(c161.596,109.047) 160.096,109.047 160.095,102.047 ; 160.096,192.22 ccw(c161.596,192.22) 161.596,190.72 ccw(c161.596,192.22) 163.096,192.22 163.096,199.22 ccw(c161.596,199.22) 161.596,200.72 ccw(c161.596,199.22) 160.096,199.22 160.095,192.22 ; 166.063,130.698 cw(c166.063,133.198) 166.063,135.698 176.063,135.698 cw(c176.063,133.198) 176.063,130.698 166.063,130.698 ; 166.063,165.698 cw(c166.063,168.198) 166.063,170.698 176.063,170.698 cw(c176.063,168.198) 176.063,165.698 166.063,165.698 ; 168.086,102.047 ccw(c169.586,102.047) 169.586,100.547 ccw(c169.586,102.047) 171.086,102.047 171.086,109.047 ccw(c169.586,109.047) 169.586,110.547 ccw(c169.586,109.047) 168.086,109.047 168.086,102.047 ; 168.086,192.22 ccw(c169.586,192.22) 169.586,190.72 ccw(c169.586,192.22) 171.086,192.22 171.086,199.22 ccw(c169.586,199.22) 169.586,200.72 ccw(c169.586,199.22) 168.086,199.22 168.086,192.22 ; 176.076,102.047 ccw(c177.576,102.047) 177.576,100.547 ccw(c177.576,102.047) 179.076,102.047 179.076,109.047 ccw(c177.576,109.047) 177.576,110.547 ccw(c177.576,109.047) 176.076,109.047 176.076,102.047 ; 184.114,102.047 ccw(c185.614,102.047) 185.614,100.547 ccw(c185.614,102.047) 187.114,102.047 187.114,109.047 ccw(c185.614,109.047) 185.614,110.547 ccw(c185.614,109.047) 184.114,109.047 184.114,102.047 ; 184.114,192.22 ccw(c185.614,192.22) 185.614,190.72 ccw(c185.614,192.22) 187.114,192.22 187.114,199.22 ccw(c185.614,199.22) 185.614,200.72 ccw(c185.614,199.22) 184.114,199.22 184.114,192.22

## Silkscreen, mask and mechanical layers (free items; w line width, h text height)
Drill Drawing:
  text ".LEGEND" at 255.88,81.28 h1.52
  text "Drill Drawing." at 255.88,78.74 h1.52

## Text inside footprints (layer, text, board x,y; h text height)
BAT: Top Overlay "+" at 130.188,136.329 h1.15
P1: Top Overlay "1" at 118.792,157.632 h1.27 r270; Top Overlay "2" at 121.332,158.14 h1.27 r270; Top Overlay "4" at 121.332,151.536 h1.27 r270; Top Overlay "3" at 118.792,151.536 h1.27 r270
P2: Top Overlay "1" at 122.408,142.868 h1.27 r90; Top Overlay "2" at 119.868,142.36 h1.27 r90; Top Overlay "4" at 119.868,148.964 h1.27 r90; Top Overlay "3" at 122.408,148.964 h1.27 r90
P3: Top Overlay "1" at 89.432,162.108 h1.27 r180; Top Overlay "2" at 89.94,159.568 h1.27 r180; Top Overlay "4" at 83.336,159.568 h1.27 r180; Top Overlay "3" at 83.336,162.108 h1.27 r180
P4: Top Overlay "1" at 83.068,138.492 h1.27; Top Overlay "2" at 82.56,141.032 h1.27; Top Overlay "4" at 89.164,141.032 h1.27; Top Overlay "3" at 89.164,138.492 h1.27
P7: Top Overlay "20" at 191.77,119.507 h1.27 r180; Top Overlay "19" at 191.77,122.047 h1.27 r180; Top Overlay "+" at 218.694,122.047 h1.27 r180; Top Overlay "-" at 218.694,119.507 h1.27 r180
P9: Top Overlay "-" at 218.694,181.483 h1.27 r180; Top Overlay "+" at 218.694,184.023 h1.27 r180; Top Overlay "19" at 191.77,184.023 h1.27 r180; Top Overlay "20" at 191.77,181.483 h1.27 r180
VBAT: Top Overlay "20" at 134.366,145.161 h1.27 r270; Top Overlay "19" at 131.826,145.161 h1.27 r270; Top Overlay "+" at 131.826,172.085 h1.27 r270; Top Overlay "-" at 134.366,172.085 h1.27 r270